# EAGLE board MiniEsp v0.5 panelized (EAGLE 7.2.0)
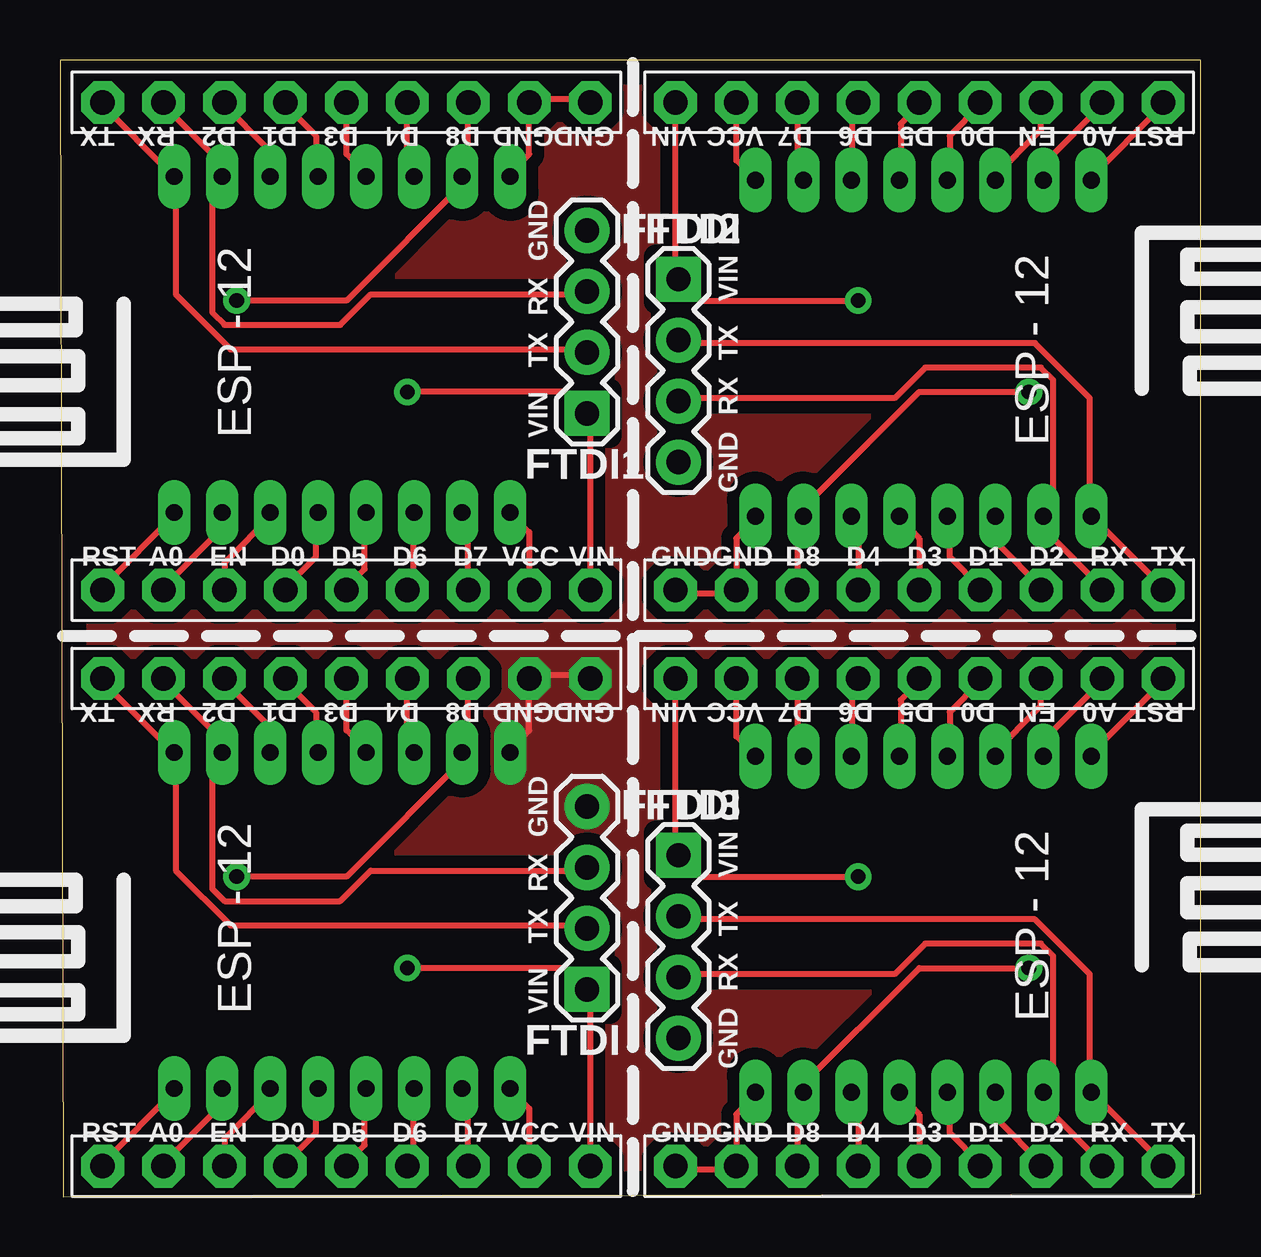
[diagram p0: board, top side]
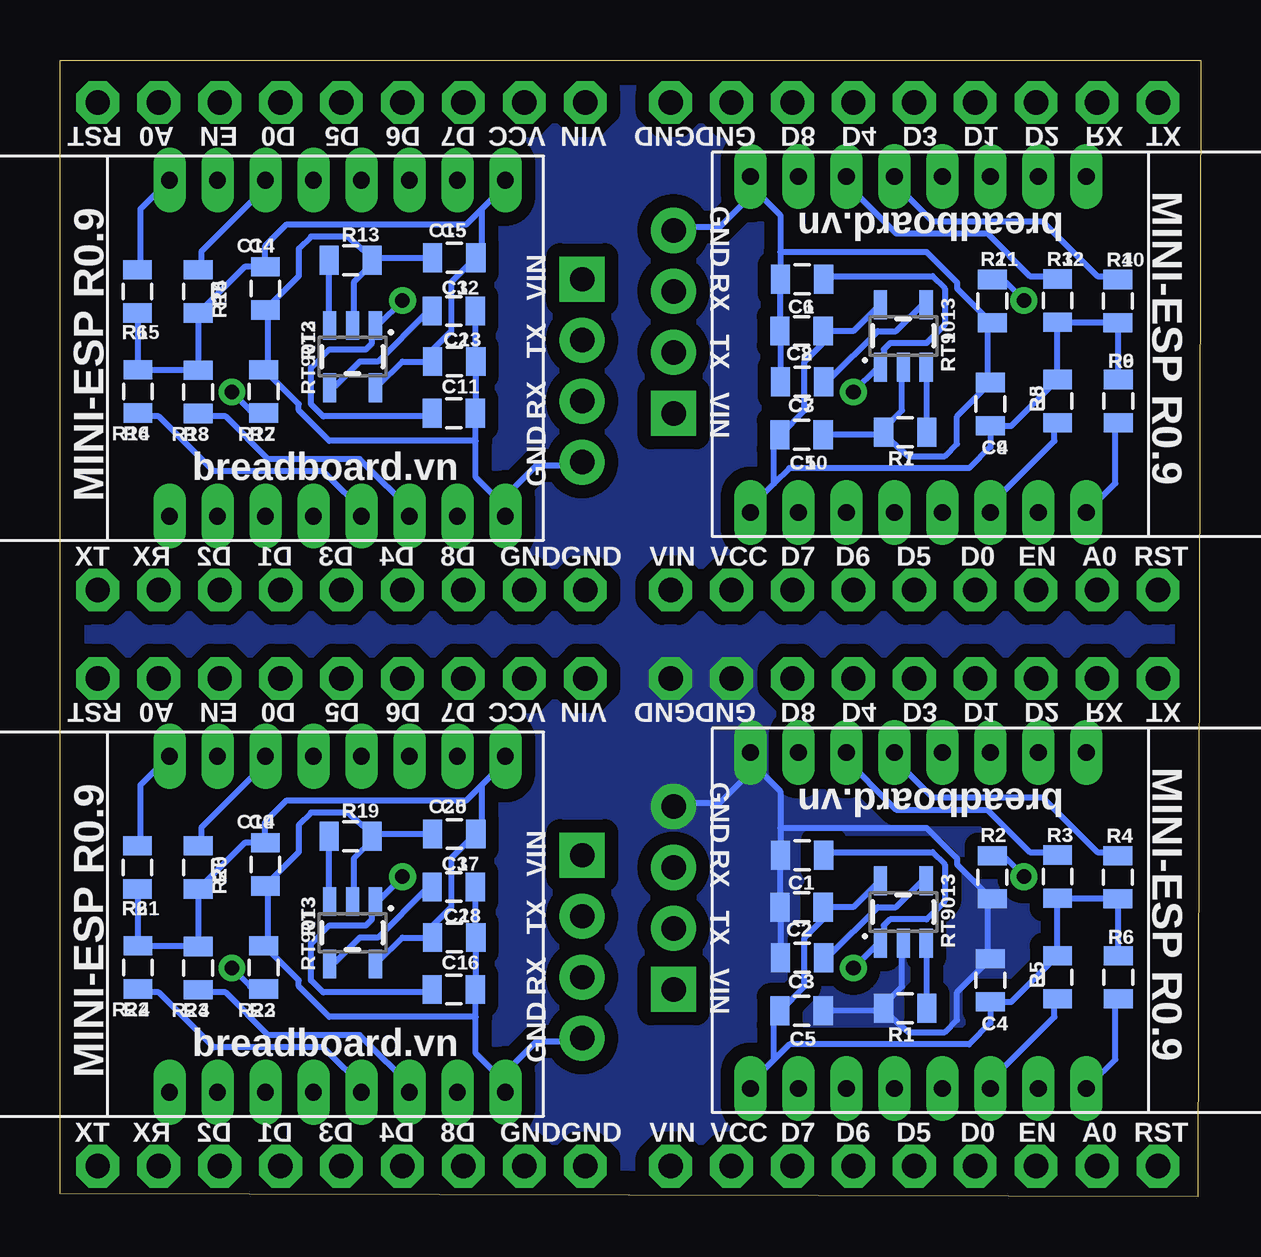
[diagram p1: board, bottom side, seen from below]

Size 47.55 x 47.36 mm. Coordinates in mm from the lower left corner, seen from the top.
Outline: 0,47.36 0.13,0 47.55,0.13 47.55,47.36 0,47.36
Copper layers (1*16): Top 0.035mm / dielectric 1.5mm / Bottom 0.035mm
Design rules "default *": minimum track width 10mil, minimum drill 24mil, track to track 10mil, track to pad 10mil, pad to pad 10mil, via to via 10mil, smd to smd 10mil, copper to edge 40mil, drill to drill 10mil, minimum pad ring 13mil, minimum via ring 10mil, stop-mask expansion 4mil, vias tented up to drill 0mil, thermal gap 10mil

## Footprints (pad centres in the part's own frame; a part is rotated, then mirrored left to right if it is on the bottom)
0805 = smd 0.8 x 1.2: 1 -0.9,0; 2 0.9,0
1X04 = drill 1.016 pad 1.88 square: 1 0,0 | drill 1.016 pad 1.88: 2 2.54,0; 3 5.08,0; 4 7.62,0
1X09-BIG = drill 1.016 pad 1.778 octagon: 1 -10.16,0; 2 -7.62,0; 3 -5.08,0; 4 -2.54,0; 5 0,0; 6 2.54,0; 7 5.08,0; 8 7.62,0; 9 10.16,0
SOT23-5 = smd 0.55 x 1.2: 1 -0.95,-1.3; 2 0,-1.3; 3 0.95,-1.3; 4 0.95,1.3; 5 -0.95,1.3
ESP12 = drill 0.7 long: ADC -7.1,3.8; CH_PD -7.1,1.8; GND 6.9,-8.2; GPIO0 6.9,-2.2; GPIO2 6.9,-4.2; GPIO4 6.9,1.8; GPIO5 6.9,-0.2; GPIO12 -7.1,-4.2; GPIO13 -7.1,-6.2; GPIO14 -7.1,-2.2; GPIO15 6.9,-6.2; GPIO16 -7.1,-0.2; RESET -7.1,5.8; RX 6.9,3.8; TX 6.9,5.8; VCC -7.1,-8.2

## Placement (x,y rotation side)
C1  1uF  [0805]  16.61,14.22 180 bottom
C2  1uF  [0805]  16.64,12.06 180 bottom
C3  22nF  [0805]  16.61,9.96 180 bottom
C4  10uF  [0805]  8.76,9.02 90 bottom
C5  100nF  [0805]  16.64,7.75 0 bottom
C6  1uF  [0805]  16.61,38.23 180 bottom
C7  22nF  [0805]  16.61,33.96 180 bottom
C8  1uF  [0805]  16.64,36.07 180 bottom
C9  10uF  [0805]  8.76,33.02 90 bottom
C10  100nF  [0805]  16.64,31.75 0 bottom
C11  1uF  [0805]  31.14,32.64 0 bottom
C12  22nF  [0805]  31.14,36.91 0 bottom
C13  1uF  [0805]  31.11,34.8 0 bottom
C14  10uF  [0805]  38.99,37.85 270 bottom
C15  100nF  [0805]  31.11,39.12 180 bottom
C16  1uF  [0805]  31.14,8.64 0 bottom
C17  22nF  [0805]  31.14,12.9 0 bottom
C18  1uF  [0805]  31.11,10.79 0 bottom
C19  10uF  [0805]  38.99,13.84 270 bottom
C20  100nF  [0805]  31.11,15.11 180 bottom
FTDI  [1X04]  21.97,8.64 90 top
FTDI1  [1X04]  21.97,32.64 90 top
FTDI2  [1X04]  25.78,38.23 270 top
FTDI3  [1X04]  25.78,14.22 270 top
JP1  [1X09-BIG]  11.94,21.59 0 top
JP2  [1X09-BIG]  11.94,1.27 180 top
JP3  [1X09-BIG]  11.94,45.59 0 top
JP4  [1X09-BIG]  11.94,25.27 180 top
JP5  [1X09-BIG]  35.81,25.27 180 top
JP6  [1X09-BIG]  35.81,45.59 0 top
JP7  [1X09-BIG]  35.81,1.27 180 top
JP8  [1X09-BIG]  35.81,21.59 0 top
R1  100K  [0805]  12.32,7.85 180 bottom
R2  10K  [0805]  8.69,13.31 270 bottom
R3  10K  [0805]  5.97,13.33 270 bottom
R4  10K  [0805]  3.45,13.31 270 bottom
R5  10K  [0805]  5.97,9.14 90 bottom
R6  10K  [0805]  3.43,9.14 90 bottom
R7  100K  [0805]  12.32,31.85 180 bottom
R8  10K  [0805]  5.97,33.15 90 bottom
R9  10K  [0805]  3.43,33.15 90 bottom
R10  10K  [0805]  3.45,37.31 270 bottom
R11  10K  [0805]  8.69,37.31 270 bottom
R12  10K  [0805]  5.97,37.34 270 bottom
R13  100K  [0805]  35.43,39.01 0 bottom
R14  10K  [0805]  41.78,37.72 270 bottom
R15  10K  [0805]  44.32,37.72 270 bottom
R16  10K  [0805]  44.3,33.55 90 bottom
R17  10K  [0805]  39.07,33.55 90 bottom
R18  10K  [0805]  41.78,33.53 90 bottom
R19  100K  [0805]  35.43,15.01 0 bottom
R20  10K  [0805]  41.78,13.72 270 bottom
R21  10K  [0805]  44.32,13.72 270 bottom
R22  10K  [0805]  44.3,9.55 90 bottom
R23  10K  [0805]  39.07,9.55 90 bottom
R24  10K  [0805]  41.78,9.53 90 bottom
RT1  3.3V/150mA  [SOT23-5]  12.4,35.86 0 bottom
RT2  3.3V/150mA  [SOT23-5]  35.36,35 180 bottom
RT3  3.3V/150mA  [SOT23-5]  35.36,11 180 bottom
RT9013  3.3V/150mA  [SOT23-5]  12.4,11.86 0 bottom
U1  [ESP12]  10.57,35.61 90 top
U2  [ESP12]  10.57,11.61 90 top
U3  [ESP12]  37.19,35.26 270 top
U4  [ESP12]  37.19,11.25 270 top

## Library data of the parts
C1 C3 C4 C6 C7 C9 C11 C12 C14 C16 C17 C19 R1-R24 = SparkFun-Passives
C2 C5 C8 C10 C13 C15 C18 C20 = SparkFun-Capacitors; PROD_ID: CAP-08402
FTDI FTDI1-FTDI3 = SparkFun-Connectors
JP1-JP8 = adafruit
RT1-RT3 RT9013 = SparkFun-PowerIC; PROD_ID: VREG-00822
U1-U4 = esp8266modules

## Nets
A0: JP2.8 U2.ADC
A1: JP4.8 U1.ADC
A2: JP6.8 U3.ADC
A3: JP8.8 U4.ADC
BP: C3.1 RT9013.4
BP1: C7.1 RT1.4
BP2: C12.1 RT2.4
BP3: C17.1 RT3.4
D0: JP2.6 U2.GPIO16
D1: JP1.4 U2.GPIO5
D2: JP1.3 U2.GPIO4
D3: JP1.5 R4.1 U2.GPIO0
D4: JP1.6 R3.1 U2.GPIO2
D5: JP2.5 U2.GPIO14
D6: JP2.4 U2.GPIO12
D7: JP2.3 U2.GPIO13
D8: JP1.7 R2.1 U2.GPIO15
D9: JP3.3 U1.GPIO4
D10: JP3.4 U1.GPIO5
D11: JP3.5 R10.1 U1.GPIO0
D12: JP3.6 R12.1 U1.GPIO2
D13: JP3.7 R11.1 U1.GPIO15
D14: JP4.6 U1.GPIO16
D15: JP4.5 U1.GPIO14
D16: JP4.4 U1.GPIO12
D17: JP4.3 U1.GPIO13
D18: JP5.3 U3.GPIO4
D19: JP5.4 U3.GPIO5
D20: JP5.5 R16.1 U3.GPIO0
D21: JP5.6 R18.1 U3.GPIO2
D22: JP5.7 R17.1 U3.GPIO15
D23: JP6.6 U3.GPIO16
D24: JP6.5 U3.GPIO14
D25: JP6.4 U3.GPIO12
D26: JP6.3 U3.GPIO13
D27: JP7.3 U4.GPIO4
D28: JP7.4 U4.GPIO5
D29: JP7.5 R22.1 U4.GPIO0
D30: JP7.6 R24.1 U4.GPIO2
D31: JP7.7 R23.1 U4.GPIO15
D32: JP8.6 U4.GPIO16
D33: JP8.5 U4.GPIO14
D34: JP8.4 U4.GPIO12
D35: JP8.3 U4.GPIO13
EN: JP2.7 R5.1 U2.CH_PD
EN1: JP4.7 R8.1 U1.CH_PD
EN2: JP6.7 R14.1 U3.CH_PD
EN3: JP8.7 R20.1 U4.CH_PD
GND: C1.2 C2.2 C3.2 C4.2 C5.2 FTDI.4 JP1.8 JP1.9 R1.2 R2.2 RT9013.2 U2.GND
GND1: C6.2 C7.2 C8.2 C9.2 C10.2 FTDI1.4 JP3.8 JP3.9 R7.2 R11.2 RT1.2 U1.GND
GND2: C11.2 C12.2 C13.2 C14.2 C15.2 FTDI2.4 JP5.8 JP5.9 R13.2 R17.2 RT2.2 U3.GND
GND3: C16.2 C17.2 C18.2 C19.2 C20.2 FTDI3.4 JP7.8 JP7.9 R19.2 R23.2 RT3.2 U4.GND
LDO_EN: R1.1 RT9013.3
LDO_EN1: R7.1 RT1.3
LDO_EN2: R13.1 RT2.3
LDO_EN3: R19.1 RT3.3
RST: JP2.9 R6.1 U2.RESET
RST1: JP4.9 R9.1 U1.RESET
RST2: JP6.9 R15.1 U3.RESET
RST3: JP8.9 R21.1 U4.RESET
RX: FTDI.3 JP1.2 U2.RX
RX1: FTDI1.3 JP3.2 U1.RX
RX2: FTDI2.3 JP5.2 U3.RX
RX3: FTDI3.3 JP7.2 U4.RX
TX: FTDI.2 JP1.1 U2.TX
TX1: FTDI1.2 JP3.1 U1.TX
TX2: FTDI2.2 JP5.1 U3.TX
TX3: FTDI3.2 JP7.1 U4.TX
VCC: C2.1 C4.1 C5.1 JP2.2 R3.2 R4.2 R5.2 R6.2 RT9013.5 U2.VCC
VCC1: C8.1 C9.1 C10.1 JP4.2 R8.2 R9.2 R10.2 R12.2 RT1.5 U1.VCC
VCC2: C13.1 C14.1 C15.1 JP6.2 R14.2 R15.2 R16.2 R18.2 RT2.5 U3.VCC
VCC3: C18.1 C19.1 C20.1 JP8.2 R20.2 R21.2 R22.2 R24.2 RT3.5 U4.VCC
VIN: C1.1 FTDI.1 JP2.1 RT9013.1
VIN1: C6.1 FTDI1.1 JP4.1 RT1.1
VIN2: C11.1 FTDI2.1 JP6.1 RT2.1
VIN3: C16.1 FTDI3.1 JP8.1 RT3.1

## Tracks (layer width: path | path; a pad name or v marks a point on that pad's centre or on a via)
A0
  Top 0.254: U2.ADC 6.6,4.45 6.6,3.68 4.32,1.4 JP2.8
A1
  Top 0.254: U1.ADC 6.6,28.45 6.6,27.69 4.32,25.4 JP4.8
A2
  Top 0.254: U3.ADC 41.15,42.42 41.15,43.18 43.43,45.47 JP6.8
A3
  Top 0.254: U4.ADC 41.15,18.41 41.15,19.18 43.43,21.46 JP8.8
BP
  Bottom 0.254: RT9013.4 11.68,13.08 12.7,12.06 13.46,12.06 15.49,10.03 C3.1
BP1
  Bottom 0.254: RT1.4 11.68,37.08 12.7,36.07 13.46,36.07 15.49,34.04 C7.1
BP2
  Bottom 0.254: RT2.4 36.07,33.78 35.05,34.8 34.29,34.8 32.26,36.83 C12.1
BP3
  Bottom 0.254: RT3.4 36.07,9.78 35.05,10.79 34.29,10.79 32.26,12.83 C17.1
D0
  Top 0.254: U2.GPIO16 10.67,4.45 10.67,2.67 9.4,1.4 JP2.6
D1
  Top 0.254: U2.GPIO5 10.67,18.67 10.67,20.19 9.4,21.46 JP1.4
D2
  Top 0.254: U2.GPIO4 8.64,18.67 8.64,19.68 6.86,21.46 JP1.3
D3
  Top 0.254: JP1.5 11.94,19.43 12.7,18.67 U2.GPIO0
  Bottom 0.254: R4.1 3.56,14.35 4.32,14.35 6.6,16.64 11.18,16.64 12.95,18.41 U2.GPIO0
D4
  Top 0.254: JP1.6 14.48,18.92 14.73,18.67 U2.GPIO2
  Bottom 0.254: R3.1 6.1,14.35 7.11,14.35 8.89,16.13 12.7,16.13 14.99,18.41 U2.GPIO2
D5
  Top 0.254: U2.GPIO14 12.7,4.45 12.7,2.16 11.94,1.4 JP2.5
D6
  Top 0.254: U2.GPIO12 14.73,4.45 14.73,1.65 14.48,1.4 JP2.4
D7
  Top 0.254: JP2.3 17.02,4.45 U2.GPIO13
D8  (via drill 0.61)
  Top 0.254: v7.37,13.33 11.94,13.33 17.02,18.41 U2.GPIO15 17.02,18.67 JP1.7
  Bottom 0.254: v7.37,13.33 8.13,14.1 8.64,14.1 R2.1
D9
  Top 0.254: U1.GPIO4 8.64,42.67 8.64,43.69 6.86,45.47 JP3.3
D10
  Top 0.254: U1.GPIO5 10.67,42.67 10.67,44.2 9.4,45.47 JP3.4
D11
  Top 0.254: JP3.5 11.94,43.43 12.7,42.67 U1.GPIO0
  Bottom 0.254: R10.1 3.56,38.35 4.32,38.35 6.6,40.64 11.18,40.64 12.95,42.42 U1.GPIO0
D12
  Top 0.254: JP3.6 14.48,42.93 14.73,42.67 U1.GPIO2
  Bottom 0.254: R12.1 6.1,38.35 7.11,38.35 8.89,40.13 12.7,40.13 14.99,42.42 U1.GPIO2
D13  (via drill 0.61)
  Top 0.254: v7.37,37.34 11.94,37.34 17.02,42.42 U1.GPIO15 17.02,42.67 JP3.7
  Bottom 0.254: v7.37,37.34 8.13,38.1 8.64,38.1 R11.1
D14
  Top 0.254: U1.GPIO16 10.67,28.45 10.67,26.67 9.4,25.4 JP4.6
D15
  Top 0.254: U1.GPIO14 12.7,28.45 12.7,26.16 11.94,25.4 JP4.5
D16
  Top 0.254: U1.GPIO12 14.73,28.45 14.73,25.65 14.48,25.4 JP4.4
D17
  Top 0.254: JP4.3 17.02,28.45 U1.GPIO13
D18
  Top 0.254: U3.GPIO4 39.12,28.19 39.12,27.18 40.89,25.4 JP5.3
D19
  Top 0.254: U3.GPIO5 37.08,28.19 37.08,26.67 38.35,25.4 JP5.4
D20
  Top 0.254: JP5.5 35.81,27.43 35.05,28.19 U3.GPIO0
  Bottom 0.254: R16.1 44.2,32.51 43.43,32.51 41.15,30.23 36.58,30.23 34.8,28.45 U3.GPIO0
D21
  Top 0.254: JP5.6 33.27,27.94 33.02,28.19 U3.GPIO2
  Bottom 0.254: R18.1 41.66,32.51 40.64,32.51 38.86,30.73 35.05,30.73 32.77,28.45 U3.GPIO2
D22  (via drill 0.61)
  Top 0.254: v40.39,33.53 35.81,33.53 30.73,28.45 U3.GPIO15 30.73,28.19 JP5.7
  Bottom 0.254: v40.39,33.53 39.62,32.77 39.12,32.77 R17.1
D23
  Top 0.254: U3.GPIO16 37.08,42.42 37.08,44.2 38.35,45.47 JP6.6
D24
  Top 0.254: U3.GPIO14 35.05,42.42 35.05,44.7 35.81,45.47 JP6.5
D25
  Top 0.254: U3.GPIO12 33.02,42.42 33.02,45.21 33.27,45.47 JP6.4
D26
  Top 0.254: JP6.3 30.73,42.42 U3.GPIO13
D27
  Top 0.254: U4.GPIO4 39.12,4.19 39.12,3.17 40.89,1.4 JP7.3
D28
  Top 0.254: U4.GPIO5 37.08,4.19 37.08,2.67 38.35,1.4 JP7.4
D29
  Top 0.254: JP7.5 35.81,3.43 35.05,4.19 U4.GPIO0
  Bottom 0.254: R22.1 44.2,8.51 43.43,8.51 41.15,6.22 36.58,6.22 34.8,4.45 U4.GPIO0
D30
  Top 0.254: JP7.6 33.27,3.94 33.02,4.19 U4.GPIO2
  Bottom 0.254: R24.1 41.66,8.51 40.64,8.51 38.86,6.73 35.05,6.73 32.77,4.45 U4.GPIO2
D31  (via drill 0.61)
  Top 0.254: v40.39,9.53 35.81,9.53 30.73,4.45 U4.GPIO15 30.73,4.19 JP7.7
  Bottom 0.254: v40.39,9.53 39.62,8.76 39.12,8.76 R23.1
D32
  Top 0.254: U4.GPIO16 37.08,18.41 37.08,20.19 38.35,21.46 JP8.6
D33
  Top 0.254: U4.GPIO14 35.05,18.41 35.05,20.7 35.81,21.46 JP8.5
D34
  Top 0.254: U4.GPIO12 33.02,18.41 33.02,21.21 33.27,21.46 JP8.4
D35
  Top 0.254: JP8.3 30.73,18.41 U4.GPIO13
EN
  Top 0.254: JP2.7 6.86,2.41 8.89,4.45 U2.CH_PD
  Bottom 0.254: R5.1 6.1,8 6.1,7.49 8.89,4.7 U2.CH_PD
EN1
  Top 0.254: JP4.7 6.86,26.42 8.89,28.45 U1.CH_PD
  Bottom 0.254: R8.1 6.1,32 6.1,31.5 8.89,28.7 U1.CH_PD
EN2
  Top 0.254: JP6.7 40.89,44.45 38.86,42.42 U3.CH_PD
  Bottom 0.254: R14.1 41.66,38.86 41.66,39.37 38.86,42.16 U3.CH_PD
EN3
  Top 0.254: JP8.7 40.89,20.45 38.86,18.41 U4.CH_PD
  Bottom 0.254: R20.1 41.66,14.86 41.66,15.37 38.86,18.16 U4.CH_PD
GND
  Top 0.254: JP1.9 22.1,21.72 19.56,21.72 JP1.8 19.56,19.43 18.8,18.67 U2.GND
  Bottom 0.254: C5.2 13.46,7.75 R1.2 | RT9013.2 12.45,10.54 12.45,8.76 13.21,8 R1.2 | R1.2 13.21,7.75 12.19,6.86 10.67,6.86 10.16,7.37 10.16,8.51 8.89,9.78 C4.2 8.89,10.03 8.89,12.32 R2.2 8.89,12.57 10.16,13.84 10.16,14.1 11.43,15.37 17.53,15.37 | C2.2 17.53,10.03 C3.2 | C2.2 17.53,14.1 C1.2 17.53,14.35 17.53,15.37 | C2.2 | 17.53,15.37 17.53,16.89 18.54,17.91 | 18.54,17.91 18.54,18.41 U2.GND 18.54,17.91 | 18.54,17.91 20.07,16.38 21.84,16.38 FTDI.4
  pour Bottom (isolate 0.559, no thermals): -1.27,51.94 61.09,51.69 61.21,-2.16 -1.14,-1.9
  pour Top (isolate 0.508, no thermals): -1.27,51.94 61.09,51.69 61.21,-2.16 -1.14,-1.9
GND1
  Top 0.254: JP3.9 22.1,45.72 19.56,45.72 JP3.8 19.56,43.43 18.8,42.67 U1.GND
  Bottom 0.254: C10.2 13.46,31.75 R7.2 | RT1.2 12.45,34.54 12.45,32.77 13.21,32 R7.2 | R7.2 13.21,31.75 12.19,30.86 10.67,30.86 10.16,31.37 10.16,32.51 8.89,33.78 C9.2 8.89,34.04 8.89,36.32 R11.2 8.89,36.58 10.16,37.85 10.16,38.1 11.43,39.37 17.53,39.37 | C8.2 17.53,34.04 C7.2 | C8.2 17.53,38.1 C6.2 17.53,38.35 17.53,39.37 | C8.2 | 17.53,39.37 17.53,40.89 18.54,41.91 | 18.54,41.91 18.54,42.42 U1.GND 18.54,41.91 | 18.54,41.91 20.07,40.39 21.84,40.39 FTDI1.4
GND2
  Top 0.254: JP5.9 25.65,25.15 28.19,25.15 JP5.8 28.19,27.43 28.96,28.19 U3.GND
  Bottom 0.254: C15.2 34.29,39.12 R13.2 | RT2.2 35.31,36.32 35.31,38.1 34.54,38.86 R13.2 | R13.2 34.54,39.12 35.56,40 37.08,40 37.59,39.5 37.59,38.35 38.86,37.08 C14.2 38.86,36.83 38.86,34.54 R17.2 38.86,34.29 37.59,33.02 37.59,32.77 36.32,31.5 30.23,31.5 | 30.23,34.8 30.23,36.83 C12.2 | 30.23,34.8 30.23,32.77 C11.2 30.23,32.51 30.23,31.5 | 30.23,34.8 C13.2 | 30.23,31.5 30.23,29.97 29.21,28.96 | 29.21,28.96 29.21,28.45 U3.GND 29.21,28.96 | 29.21,28.96 27.69,30.48 25.91,30.48 FTDI2.4
GND3
  Top 0.254: JP7.9 25.65,1.14 28.19,1.14 JP7.8 28.19,3.43 28.96,4.19 U4.GND
  Bottom 0.254: C20.2 34.29,15.11 R19.2 | RT3.2 35.31,12.32 35.31,14.1 34.54,14.86 R19.2 | R19.2 34.54,15.11 35.56,16 37.08,16 37.59,15.49 37.59,14.35 38.86,13.08 C19.2 38.86,12.83 38.86,10.54 R23.2 38.86,10.29 37.59,9.02 37.59,8.76 36.32,7.49 30.23,7.49 | 30.23,10.79 30.23,12.83 C17.2 | 30.23,10.79 30.23,8.76 C16.2 30.23,8.51 30.23,7.49 | 30.23,10.79 C18.2 | 30.23,7.49 30.23,5.97 29.21,4.95 | 29.21,4.95 29.21,4.45 U4.GND 29.21,4.95 | 29.21,4.95 27.69,6.48 25.91,6.48 FTDI3.4
LDO_EN
  Bottom 0.254: R1.1 11.43,8 11.43,10.54 RT9013.3
LDO_EN1
  Bottom 0.254: R7.1 11.43,32 11.43,34.54 RT1.3
LDO_EN2
  Bottom 0.254: R13.1 36.32,38.86 36.32,36.32 RT2.3
LDO_EN3
  Bottom 0.254: R19.1 36.32,14.86 36.32,12.32 RT3.3
RST
  Top 0.254: JP2.9 1.78,1.4 4.83,4.45 U2.RESET
  Bottom 0.254: R6.1 3.56,8 3.56,5.72 4.57,4.7 U2.RESET
RST1
  Top 0.254: JP4.9 1.78,25.4 4.83,28.45 U1.RESET
  Bottom 0.254: R9.1 3.56,32 3.56,29.72 4.57,28.7 U1.RESET
RST2
  Top 0.254: JP6.9 45.97,45.47 42.93,42.42 U3.RESET
  Bottom 0.254: R15.1 44.2,38.86 44.2,41.15 43.18,42.16 U3.RESET
RST3
  Top 0.254: JP8.9 45.97,21.46 42.93,18.41 U4.RESET
  Bottom 0.254: R21.1 44.2,14.86 44.2,17.15 43.18,18.16 U4.RESET
RX
  Top 0.254: JP1.2 4.32,21.46 6.6,19.18 6.6,18.67 U2.RX 6.6,18.41 6.35,18.16 6.35,12.83 6.86,12.32 11.68,12.32 12.95,13.59 21.84,13.59 FTDI.3
RX1
  Top 0.254: JP3.2 4.32,45.47 6.6,43.18 6.6,42.67 U1.RX 6.6,42.42 6.35,42.16 6.35,36.83 6.86,36.32 11.68,36.32 12.95,37.59 21.84,37.59 FTDI1.3
RX2
  Top 0.254: JP5.2 43.43,25.4 41.15,27.69 41.15,28.19 U3.RX 41.15,28.45 41.4,28.7 41.4,34.04 40.89,34.54 36.07,34.54 34.8,33.27 25.91,33.27 FTDI2.3
RX3
  Top 0.254: JP7.2 43.43,1.4 41.15,3.68 41.15,4.19 U4.RX 41.15,4.45 41.4,4.7 41.4,10.03 40.89,10.54 36.07,10.54 34.8,9.27 25.91,9.27 FTDI3.3
TX
  Top 0.254: JP1.1 1.78,21.46 4.57,18.67 U2.TX 4.83,18.41 4.83,13.59 7.11,11.3 21.84,11.3 FTDI.2
TX1
  Top 0.254: JP3.1 1.78,45.47 4.57,42.67 U1.TX 4.83,42.42 4.83,37.59 7.11,35.31 21.84,35.31 FTDI1.2
TX2
  Top 0.254: JP5.1 45.97,25.4 43.18,28.19 U3.TX 42.93,28.45 42.93,33.27 40.64,35.56 25.91,35.56 FTDI2.2
TX3
  Top 0.254: JP7.1 45.97,1.4 43.18,4.19 U4.TX 42.93,4.45 42.93,9.27 40.64,11.56 25.91,11.56 FTDI3.2
VCC
  Top 0.254: JP2.2 19.56,3.68 18.8,4.45 U2.VCC
  Bottom 0.254: RT9013.5 13.46,13.08 14.48,12.06 C2.1 15.75,11.56 16.51,10.79 16.51,8.76 C5.1 17.78,7.75 17.78,5.72 | 17.78,5.72 18.8,4.7 U2.VCC | 17.78,5.72 17.14,6.35 9.65,6.35 8.76,7.24 C4.1 7.9,8.12 R5.2 R3.2 3.48,12.44 R4.2 3.45,10.07 R6.2
VCC1
  Top 0.254: JP4.2 19.56,27.69 18.8,28.45 U1.VCC
  Bottom 0.254: RT1.5 13.46,37.08 14.48,36.07 C8.1 15.75,35.56 16.51,34.8 16.51,32.77 C10.1 17.78,31.75 17.78,29.72 | 17.78,29.72 18.8,28.7 U1.VCC | 17.78,29.72 17.14,30.35 9.65,30.35 8.76,31.24 C9.1 7.9,32.12 R8.2 R12.2 3.48,36.44 R10.2 3.45,34.07 R9.2
VCC2
  Top 0.254: JP6.2 28.19,43.18 28.96,42.42 U3.VCC
  Bottom 0.254: RT2.5 34.29,33.78 33.27,34.8 C13.1 32,35.31 31.24,36.07 31.24,38.1 30.23,39.12 C15.1 29.97,39.12 29.97,41.15 | 29.97,41.15 28.96,42.16 U3.VCC | 29.97,41.15 30.61,40.51 38.1,40.51 38.99,39.62 C14.1 39.86,38.75 R14.2 R18.2 44.27,34.43 R16.2 44.3,36.79 R15.2
VCC3
  Top 0.254: JP8.2 28.19,19.18 28.96,18.41 U4.VCC
  Bottom 0.254: RT3.5 34.29,9.78 33.27,10.79 C18.1 32,11.3 31.24,12.06 31.24,14.1 30.23,15.11 C20.1 29.97,15.11 29.97,17.15 | 29.97,17.15 28.96,18.16 U4.VCC | 29.97,17.15 30.61,16.51 38.1,16.51 38.99,15.62 C19.1 39.86,14.74 R20.2 R24.2 44.27,10.42 R22.2 44.3,12.79 R21.2
VIN  (via drill 0.61)
  Top 0.254: JP2.1 22.1,8.51 FTDI.1 21.08,9.53 v14.48,9.53
  Bottom 0.254: C1.1 15.49,14.35 11.18,14.35 10.67,13.84 10.67,12.32 11.43,11.56 12.95,11.56 13.21,11.3 13.21,10.79 RT9013.1 13.46,10.54 v14.48,9.53
VIN1  (via drill 0.61)
  Top 0.254: JP4.1 22.1,32.51 FTDI1.1 21.08,33.53 v14.48,33.53
  Bottom 0.254: C6.1 15.49,38.35 11.18,38.35 10.67,37.85 10.67,36.32 11.43,35.56 12.95,35.56 13.21,35.31 13.21,34.8 RT1.1 13.46,34.54 v14.48,33.53
VIN2  (via drill 0.61)
  Top 0.254: JP6.1 25.65,38.35 FTDI2.1 26.67,37.34 v33.27,37.34
  Bottom 0.254: C11.1 32.26,32.51 36.58,32.51 37.08,33.02 37.08,34.54 36.32,35.31 34.8,35.31 34.54,35.56 34.54,36.07 RT2.1 34.29,36.32 v33.27,37.34
VIN3  (via drill 0.61)
  Top 0.254: JP8.1 25.65,14.35 FTDI3.1 26.67,13.33 v33.27,13.33
  Bottom 0.254: C16.1 32.26,8.51 36.58,8.51 37.08,9.02 37.08,10.54 36.32,11.3 34.8,11.3 34.54,11.56 34.54,12.06 RT3.1 34.29,12.32 v33.27,13.33

## Text on the board
tNames: TX | RX | D2 | D1 | D3 | D4 | D8 | GND | GND | VIN | VCC | D7 | D6 | D5 | D0 | EN | A0 | RST | GND | VIN | RX | TX | TX | RX | VIN | GND | RST | A0 | EN | D0 | D5 | D6 | D7 | VCC | VIN | GND | GND | D8 | D4 | D3 | D1 | D2 | RX | TX | TX | RX | D2 | D1 | D3 | D4 | D8 | GND | GND | VIN | VCC | D7 | D6 | D5 | D0 | EN | A0 | RST | GND | VIN | RX | TX | TX | RX | VIN | GND | RST | A0 | EN | D0 | D5 | D6 | D7 | VCC | VIN | GND | GND | D8 | D4 | D3 | D1 | D2 | RX | TX
bNames: TX | RX | D2 | D1 | D3 | D4 | D8 | GND | GND | VIN | VCC | D7 | D6 | D5 | D0 | EN | A0 | RST | MINI-ESP R0.9 | breadboard.vn | GND | RX | VIN | TX | TX | VIN | RX | GND | breadboard.vn | MINI-ESP R0.9 | RST | A0 | EN | D0 | D5 | D6 | D7 | VCC | VIN | GND | GND | D8 | D4 | D3 | D1 | D2 | RX | TX | TX | RX | D2 | D1 | D3 | D4 | D8 | GND | GND | VIN | VCC | D7 | D6 | D5 | D0 | EN | A0 | RST | MINI-ESP R0.9 | breadboard.vn | GND | RX | VIN | TX | TX | VIN | RX | GND | breadboard.vn | MINI-ESP R0.9 | RST | A0 | EN | D0 | D5 | D6 | D7 | VCC | VIN | GND | GND | D8 | D4 | D3 | D1 | D2 | RX | TX
_tNames: FTDI | FTDI | FTDI | FTDI
_bNames: C5 | R1 | C4 | R4 | R3 | R2 | C3 | R5 | C1 | RT9013 | C2 | C2 | R6 | R6 | RT9013 | C1 | R5 | C3 | R2 | R3 | R4 | C4 | R1 | C5 | C5 | R1 | C4 | R4 | R3 | R2 | C3 | R5 | C1 | RT9013 | C2 | C2 | R6 | R6 | RT9013 | C1 | R5 | C3 | R2 | R3 | R4 | C4 | R1 | C5